# EAGLE board teensy_connector_sm (EAGLE 7.5.0)
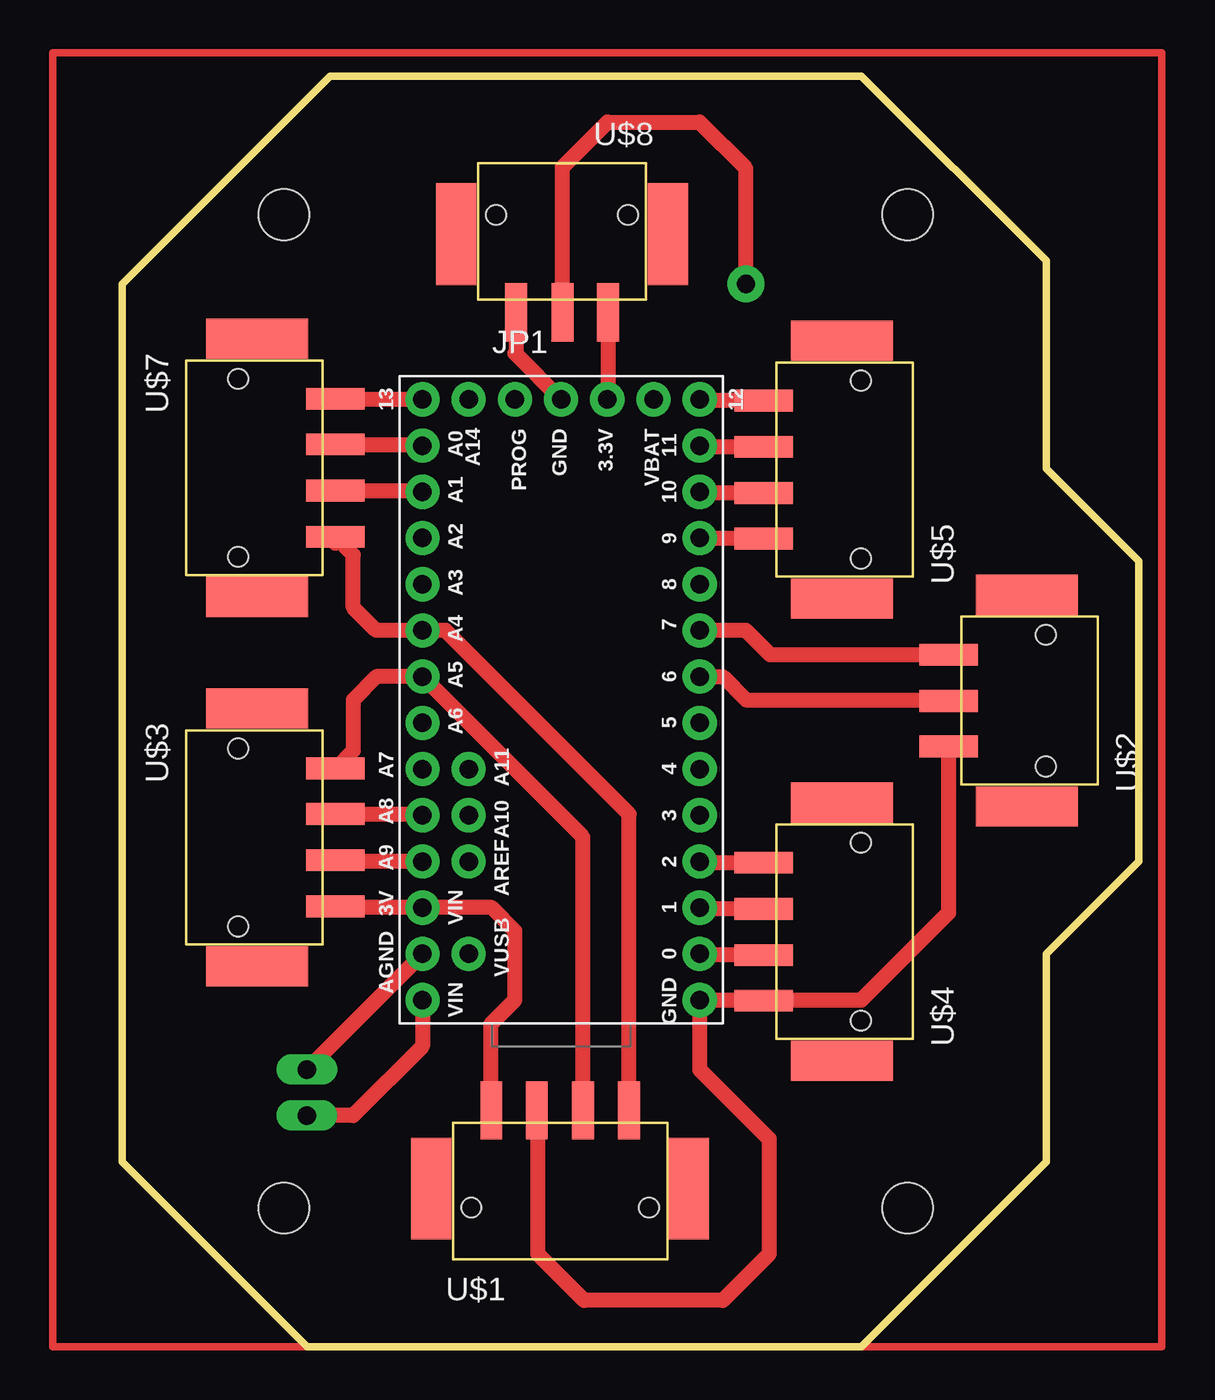
[diagram p0: board, top side]
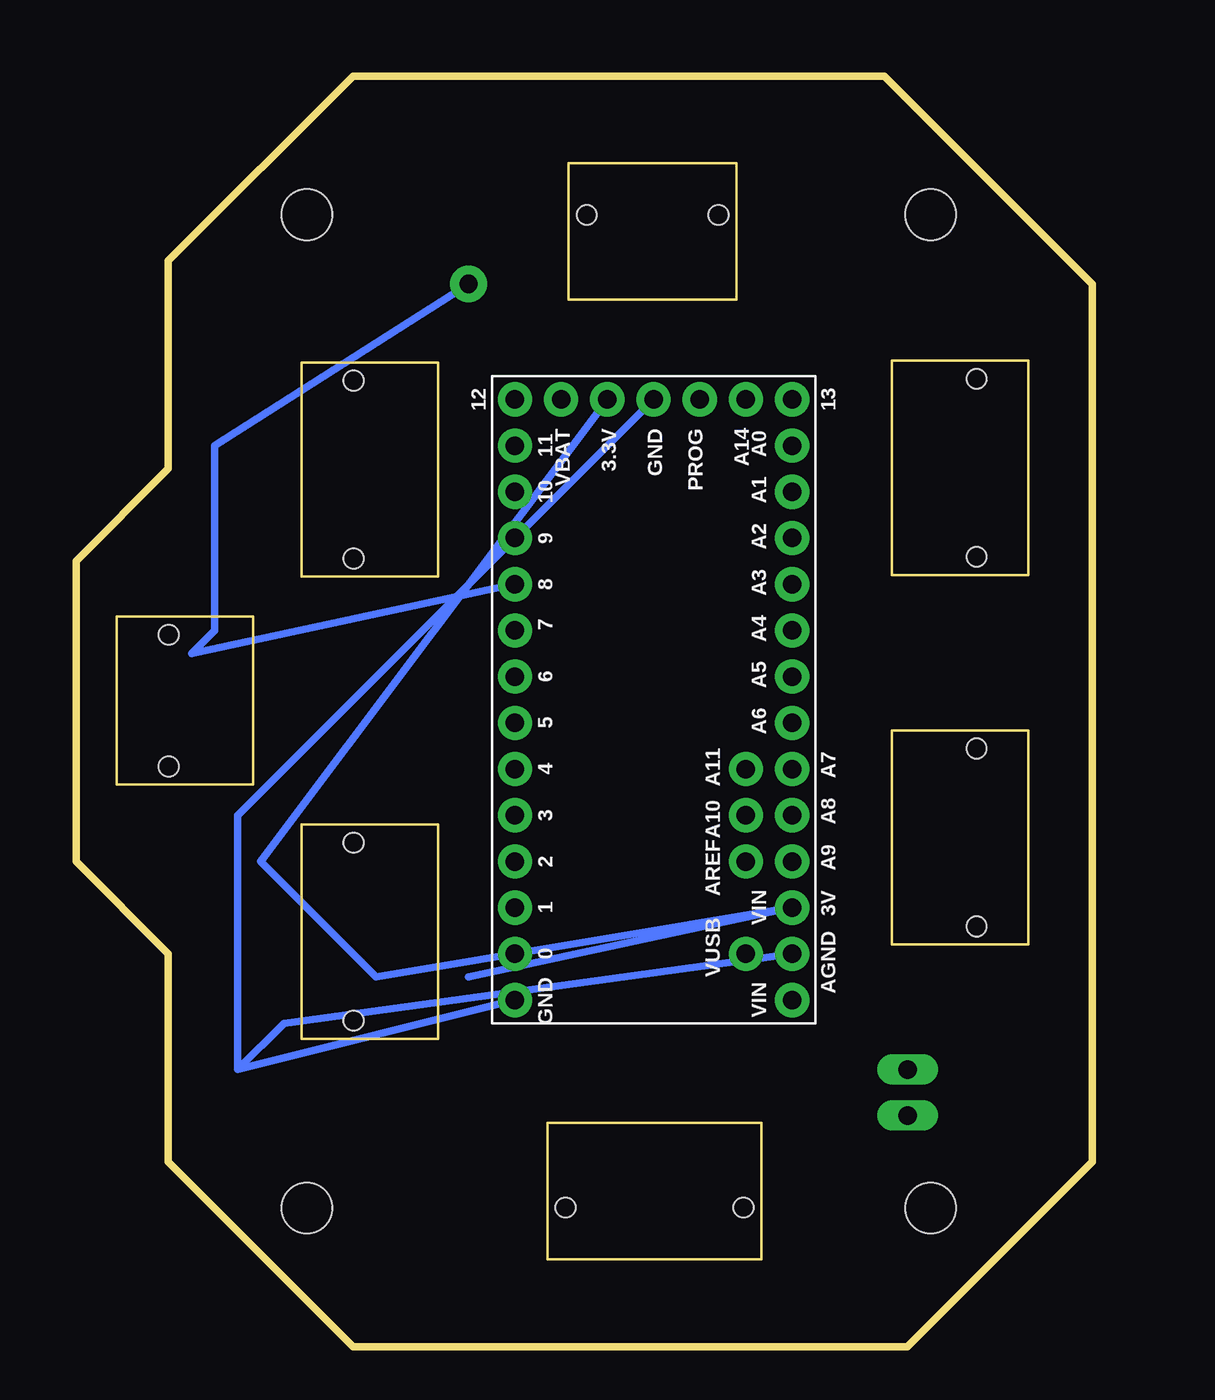
[diagram p1: board, bottom side, seen from below]

Size 55.88 x 69.85 mm. Coordinates in mm from the lower left corner, seen from the top.
Outline: 0,58.42 0,10.16 10.16,0 40.64,0 50.8,10.16 50.8,21.59 55.88,26.67 55.88,43.18 50.8,48.26 50.8,59.69 40.64,69.85 11.43,69.85 0,58.42
Copper layers (1*16): Top 0.035mm / dielectric 1.5mm / Bottom 0.035mm
Design rules "default": minimum track width 10mil, minimum drill 24mil, track to track 8mil, track to pad 8mil, pad to pad 8mil, via to via 8mil, smd to smd 8mil, copper to edge 40mil, drill to drill 8mil, minimum pad ring 10mil, minimum via ring 8mil, stop-mask expansion 4mil, vias tented up to drill 0mil, thermal gap 10mil
Holes 2.8 mm at 8.89,62.23 43.18,62.23 43.18,7.62 8.89,7.62

## Footprints (pad centres in the part's own frame; a part is rotated, then mirrored left to right if it is on the bottom)
TEENSY-3.1 = drill 1.016 pad 1.88: 0 16.51,3.81; 1 16.51,6.35; 2 16.51,8.89; 3 16.51,11.43; 3.3V 11.43,34.29; 3V 1.27,6.35; 4 16.51,13.97; 5 16.51,16.51; 6 16.51,19.05; 7 16.51,21.59; 8 16.51,24.13; 9 16.51,26.67; 10 16.51,29.21; 11 16.51,31.75; 12 16.51,34.29; 13 1.27,34.29; 14 1.27,31.75; 15 1.27,29.21; 16 1.27,26.67; 17 1.27,24.13; 18 1.27,21.59; 19 1.27,19.05; 20 1.27,16.51; 21 1.27,13.97; 22 1.27,11.43; 23 1.27,8.89; A10 3.81,11.43; A11 3.81,13.97; A14/DAC 3.81,34.29; AGND 1.27,3.81; AREF 3.81,8.89; GND 8.89,34.29; GND1 16.51,1.27; PROG 6.35,34.29; VBAT 13.97,34.29; VIN 1.27,1.27; VUSB 3.81,3.81
M04_SMD_RIGHT = smd 2.2 x 5.6: B1 -7.14,1.07; B2 7.04,1.07 | smd 1.2 x 3.2: P1 -3.84,5.37; P2 -1.34,5.37; P3 1.2,5.37; P4 3.74,5.37 | hole 1.1: -4.94,0.02; 4.84,0.02
M03_SMD_RIGHT = smd 2.2 x 5.6: B1 -5.87,1.07; B2 5.77,1.07 | smd 1.2 x 3.2: P1 -2.57,5.37; P2 -0.07,5.37; P3 2.47,5.37 | hole 1.1: -3.67,0.02; 3.57,0.02
HEADER-2 = drill 1.016 pad 1.676 long: 1 0,0; 2 0,2.54

## Placement (x,y rotation side)
JP1  TEENSY-3.1SILK  [TEENSY-3.1]  15.24,17.78 0 top
U$1  PTSM0,4-HH-2,5-SMD-R44  [M04_SMD_RIGHT]  24.13,7.62 0 top
U$2  PTSM0,3-HH-2,5-SMD-R44  [M03_SMD_RIGHT]  50.8,35.56 90 top
U$3  PTSM0,4-HH-2,5-SMD-R44  [M04_SMD_RIGHT]  6.35,27.94 270 top
U$4  PTSM0,4-HH-2,5-SMD-R44  [M04_SMD_RIGHT]  40.64,22.86 90 top
U$5  PTSM0,4-HH-2,5-SMD-R44  [M04_SMD_RIGHT]  40.64,48.26 90 top
U$6  HEADER-2  [HEADER-2]  10.16,15.24 180 top
U$7  PTSM0,4-HH-2,5-SMD-R44  [M04_SMD_RIGHT]  6.35,48.26 270 top
U$8  PTSM0,3-HH-2,5-SMD-R44  [M03_SMD_RIGHT]  24.13,62.23 180 top

## Library data of the parts
JP1 = SparkFun-Boards; SF_ID: DEV-12646
U$1-U$5 U$7 U$8 = PTSM_Connector
U$6 = homemade-hardware

## Nets
BCLK: JP1.9 U$5.P1
GND: JP1.AGND JP1.GND JP1.GND1 U$1.P2 U$2.P1 U$4.P1 U$6.1 U$8.P3
LRCLK: JP1.23 U$3.P3
MCLK: JP1.11 U$5.P3
MEMCS: JP1.6 U$2.P2
MISO: JP1.12 U$5.P4
MOSI: JP1.7 U$2.P3
N$1: JP1.1 U$4.P3
N$2: JP1.0 U$4.P2
N$3: JP1.8 U$8.P2
N$4: JP1.2 U$4.P4
RX: JP1.13 U$7.P1
SCL: JP1.19 U$1.P3 U$3.P1
SCLK: JP1.14 U$7.P2
SDA: JP1.18 U$1.P4 U$7.P4
SDCS: JP1.10 U$5.P2
TX: JP1.22 U$3.P2
VCC: JP1.3.3V JP1.3V U$1.P1 U$3.P4 U$8.P1
VIN: JP1.VIN U$6.2
VOL: JP1.15 U$7.P3

## Tracks (layer width: path | path; a pad name or v marks a point on that pad's centre or on a via)
BCLK
  Top 0.813: U$5.P1 31.78,44.42 JP1.9
GND
  Top 0.813: U$2.P1 45.43,23.84 40.64,19.05 36.57,19.05 36.54,19.02 U$4.P1 31.78,19.02 JP1.GND1 31.75,15.24 35.56,11.43 35.56,5.08 33.02,2.54 25.4,2.54 22.86,5.08 22.86,12.92 U$1.P2 | U$8.P3 21.66,54.68 21.59,54.61 JP1.GND | U$6.1 JP1.AGND
  Bottom 0.406: JP1.AGND 44.45,17.78 46.99,15.24 | 46.99,15.24 JP1.GND1 | JP1.GND 46.99,29.21 46.99,15.24
LRCLK
  Top 0.813: JP1.23 10.52,26.67 U$3.P3
MCLK
  Top 0.813: U$5.P3 31.82,49.46 JP1.11
MEMCS
  Top 0.813: JP1.6 33.02,36.83 34.29,35.56 45.36,35.56 U$2.P2
MISO
  Top 0.813: U$5.P4 31.82,52 JP1.12
MOSI
  Top 0.813: U$2.P3 35.63,38.03 34.29,39.37 JP1.7
N$1
  Top 0.813: U$4.P3 31.82,24.06 JP1.1
N$2
  Top 0.813: U$4.P2 31.82,21.52 JP1.0
N$3  (via drill 1 pad 2.03)
  Top 0.813: U$8.P2 24.2,64.84 26.67,67.31 31.75,67.31 34.29,64.77 v34.29,58.42
  Bottom 0.406: JP1.8 49.53,38.1 48.26,39.37 48.26,49.53 v34.29,58.42
N$4
  Top 0.813: U$4.P4 31.82,26.6 JP1.2
N$5
  Top 0.406: -3.81,71.12 57.15,71.12 57.15,0 -3.81,0 -3.81,71.12
RX
  Top 0.813: U$7.P1 16.48,52.1 JP1.13
SCL
  Top 0.813: U$1.P3 25.33,28.01 JP1.19 13.97,36.83 12.7,35.56 12.7,32.76 U$3.P1
SCLK
  Top 0.813: U$7.P2 16.44,49.6 JP1.14
SDA
  Top 0.813: U$1.P4 27.87,29.28 17.78,39.37 JP1.18 13.97,39.37 12.7,40.64 12.7,43.54 U$7.P4 11.72,44.16
SDCS
  Top 0.813: U$5.P2 31.82,46.92 JP1.10
TX
  Top 0.813: U$3.P2 16.44,29.28 JP1.22
VCC
  Top 0.813: U$1.P1 20.29,17.75 21.59,19.05 21.59,22.86 20.32,24.13 JP1.3V 10.52,24.13 U$3.P4 | U$8.P1 26.7,52.1 JP1.3.3V
  Bottom 0.406: JP1.3.3V 45.72,26.67 39.37,20.32 JP1.3V 34.29,20.32
VIN
  Top 0.813: JP1.VIN 16.51,16.51 12.7,12.7 U$6.2
VOL
  Top 0.813: U$7.P3 16.44,47.06 JP1.15